# Altium PCB VIGIA_2_2.PcbDoc
Units mm, origin at the board's own origin, x right, y up, seen from the top; angles counter-clockwise.
Board outline 27 x 37 mm, 2 copper layers (Top Layer, Bottom Layer); 22 components, 24 nets, 76 pads, 6 vias.
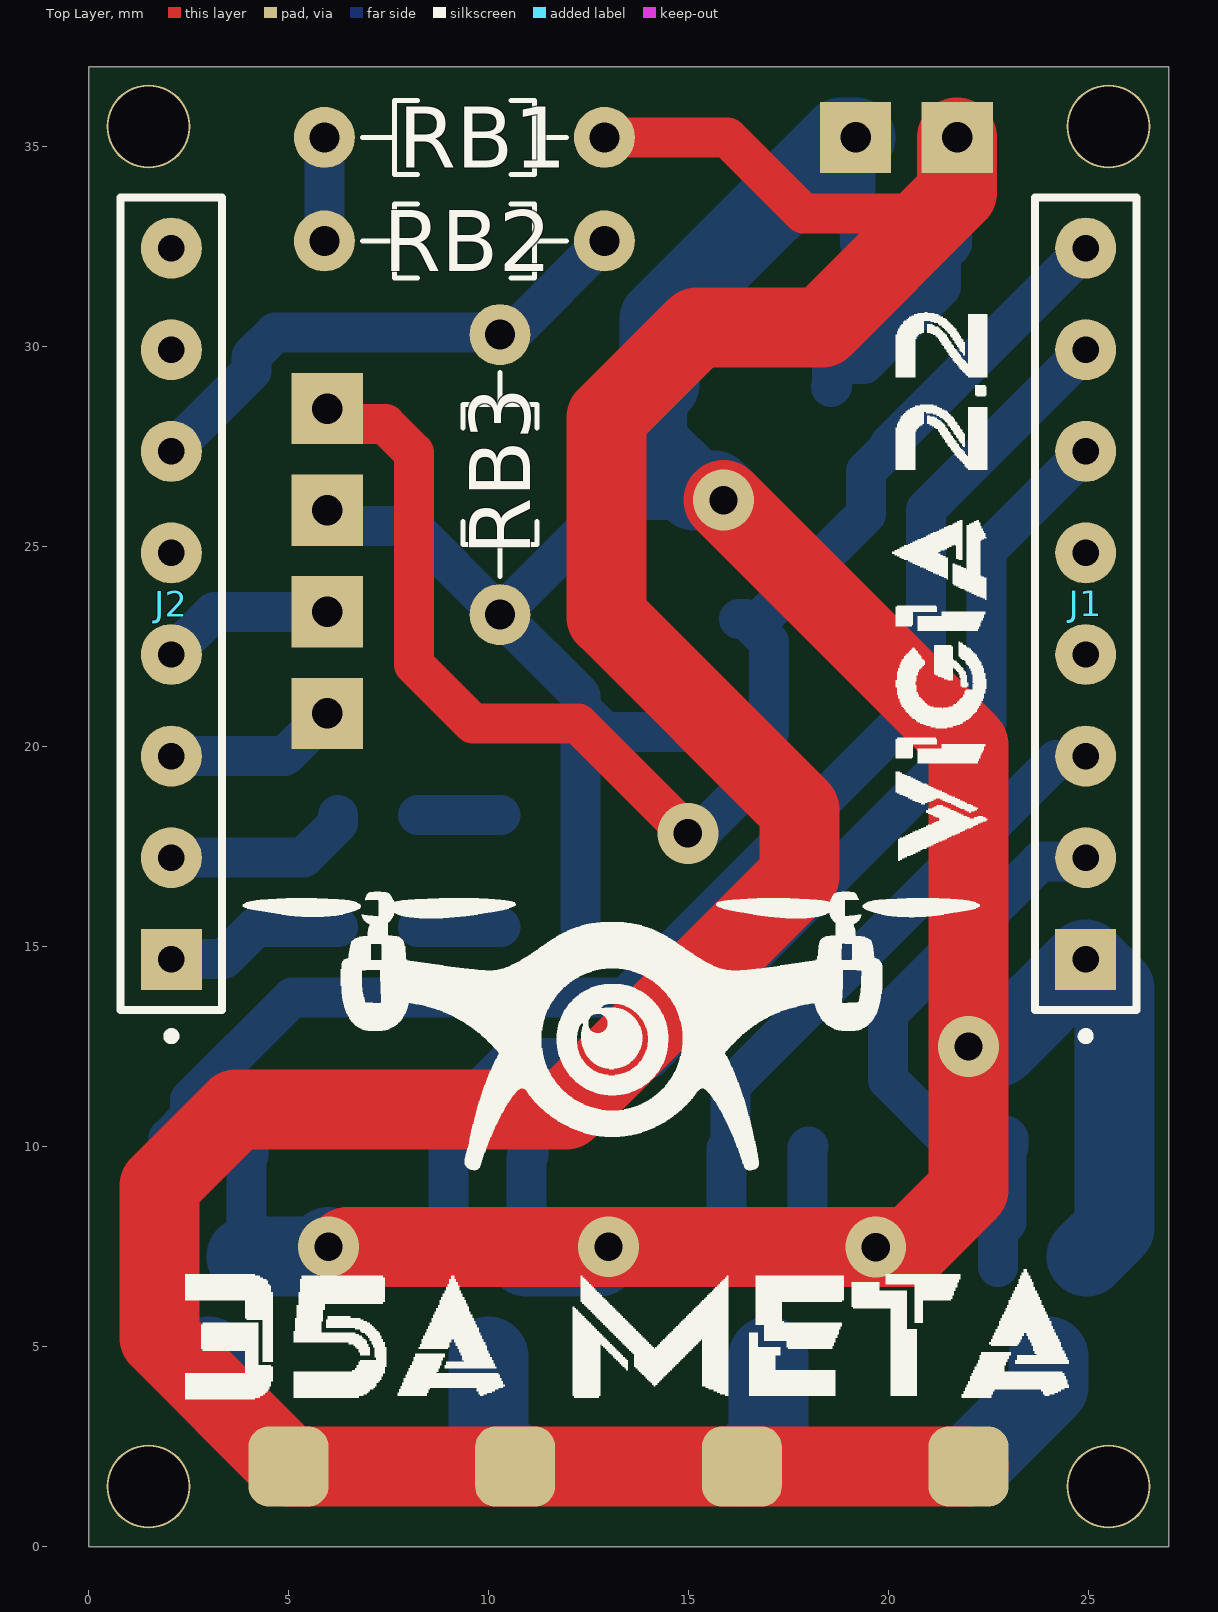
[diagram p0: Top Layer view]
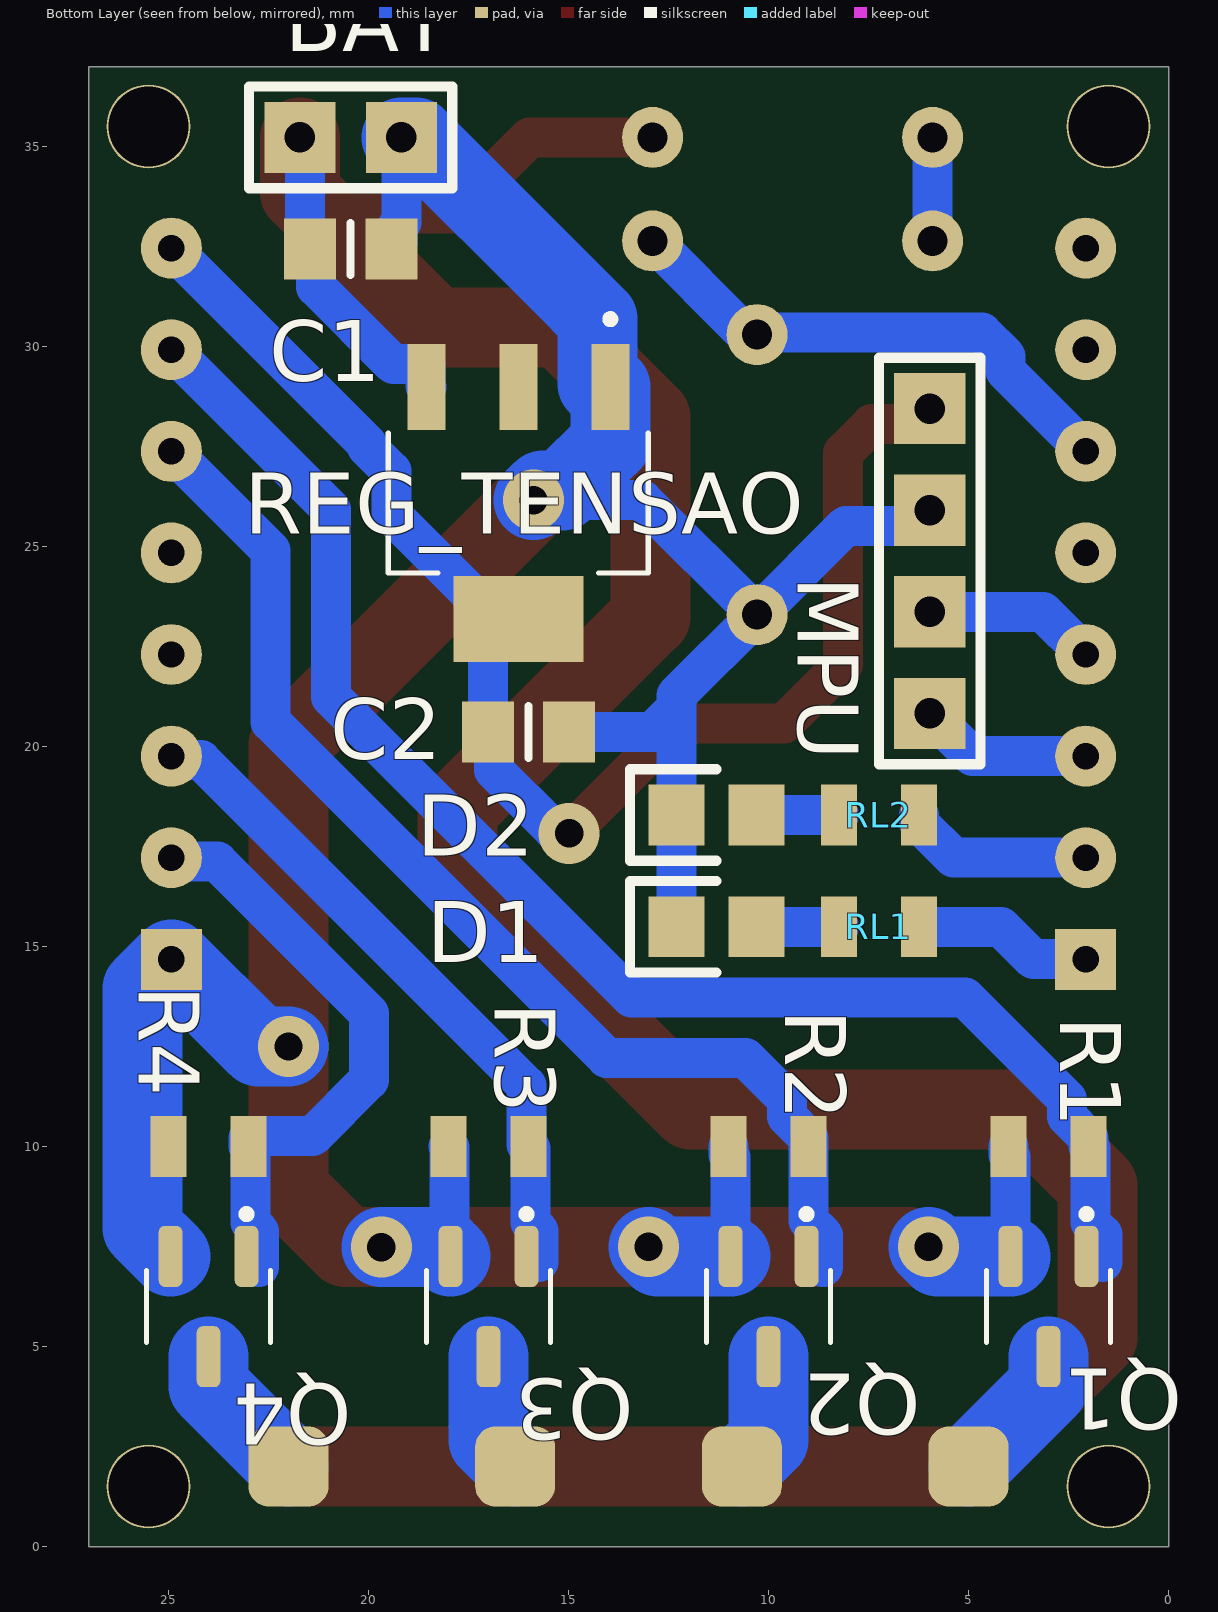
[diagram p1: Bottom Layer view, seen from below]

## Layer stack, top to bottom
Top Solder: solder mask 0.0102, Solder Resist, Dk 3.5
Top Layer: signal copper 0.0356
Dielectric 1: dielectric 0.32, FR-4, Dk 4.8
Bottom Layer: signal copper 0.0356
Bottom Solder: solder mask 0.0102, Solder Resist, Dk 3.5

## Board outline
0,0 0,37 27,37 27,0

## Design rules (kind name [scope] priority, off if disabled: settings)
Clearance [All] p1: gap=0.508 ignorepadtopadclearanceinfootprint=FALSE
PolygonConnect [All] p1: connectstyle=Relief reliefconductorwidth=0.254 reliefentries=4 polygonreliefangle="90 Angle" airgapwidth=0.254
RoutingVias [All] p1: holewidth=0.711 width=1.27 viastyle="Through Hole" minholewidth=0.711 minwidth=1.27 maxholewidth=0.711 maxwidth=1.27
SolderMaskExpansion [All] p1: expansion=0.102 istentingtop=FALSE
SupplyNets "Schematic Supply Nets" [InNet('GND')] p1: voltage=0.000
Width [All] p1: maxlimit=3 minlimit=1 preferedwidth=2 minimp=50.000000 maximp=50.000000 favimp=50.000000
30 further rules are at their usual default settings.

## Components (designator, comment, footprint, x,y, rotation, side; value= is the part's Value field where it differs from the comment)
BAT "CONECTOR_2PIN" CON2 21.717,35.227 r180 bottom
C1 "CAP" "CAP 0805" 20.447,32.433 r0 bottom
C2 "CAP" "CAP 0805" 16.002,20.368 r0 bottom
D1 "DBGLED1" "LED 0805" 11.303,15.494 r0 bottom
D2 "DBGLED2" "LED 0805" 11.303,18.288 r0 bottom
J1 "GESP1" SAMTEC_SS-108-T-2 24.93,14.68 r270 top
J2 "GESP2" SAMTEC_SS-108-T-2 2.07,14.68 r270 top
MPU "CONECTOR_4PIN" CON4 5.969,28.448 r270 bottom (schematic designator MPU_6050)
Q1 "AO3400A" SOT95P280X125-3N 3,6 r270 bottom
Q2 "AO3400A" SOT95P280X125-3N 10,6 r270 bottom
Q3 "AO3400A" SOT95P280X125-3N 17,6 r270 bottom
Q4 "AO3400A" SOT95P280X125-3N 24,6 r270 bottom
R1 "RESISTOR" "RES 0805" 3,10 r180 bottom value=10k
R2 "RESISTOR" "RES 0805" 10,10 r180 bottom value=10k
R3 "RESISTOR" "RES 0805" 17,10 r180 bottom value=10k
R4 "RESISTOR" "RES 0805" 24,10 r180 bottom value=10k
RB1 "820K" RESAD700W45L350D185 9.398,35.227 r0 top
RB2 "82 Ohms" RESAD700W45L350D185 9.398,32.639 r0 top
RB3 "3M3" RESAD700W45L350D185 10.287,26.797 r90 top
REG_TENSAO "TLV1117LV33" VREG_TLV1117LV33DCYR 16.256,26.083 r270 bottom
RL1 "RESISTOR" "RES 0805" 7.239,15.494 r0 bottom value=100
RL2 "RESISTOR" "RES 0805" 7.239,18.288 r0 bottom value=100

## Footprints (in the part's own frame and the unit in brackets; to place one, negate y for a bottom-side part, rotate by r counter-clockwise, add the part's x,y. Pads: shape width x height; smd on the part's side, far side on the other; paste and mask are expansions set on the pad)
"CAP 0805" [mil] "0805"
  rect 51.18x60 smd: 1(-40,0) 2(40,0)
  silkscreen extent 0,-26 0,26, body extent -41,-24 38,23, height 35
CON2 [mil]
  rect 70x70 hole 30: 1(0,0) 2(100,0)
  silkscreen extent -50,-50 150,50, body extent -42,-47 143,45, height 519
CON4 [mil]
  rect 70x70 hole 30: 1(0,0) 2(100,0) 3(200,0) 4(300,0)
  silkscreen extent -50,-50 350,50, body extent -50,-47 343,45, height 519
"LED 0805" [mm] "0805"
  rect 1.4x1.524 smd: 1(-1,0) 2(1,0)
  silkscreen extent 0,-1.14 2.16,1.14, body extent -1.03,-0.4 1.03,0.51, height 0.85
"RES 0805" [mm] "0805 (1/8W)"
  rect 0.9x1.524 smd: 1(-1,0) 2(1,0)
  body extent -1.02,-0.63 0.95,0.6, height 0.48
RESAD700W45L350D185 [mm]
  round 1.524 hole 0.75: 1(-3.5,0) 2(3.5,0)
  silkscreen extent -2.55,-0.92 2.55,0.92, body extent -3.72,-0.92 3.72,0.92, height 1.84
SAMTEC_SS-108-T-2 [mil]
  rect 60x60 hole 25.98: 01(0,0)
  round 60 hole 25.98: 02(-100,0) 03(-200,0) 04(-300,0) 05(-400,0) 06(-500,0) 07(-600,0) 08(-700,0)
  silkscreen extent -750,-50 80,50
SOT95P280X125-3N [mm]
  rrect50% 1.524x0.59 smd: 1(-1.255,0.95) 2(-1.255,-0.95) 3(1.255,0)
  silkscreen extent -2.41,-1.55 0.9,1.55, body extent -1.4,-1.45 1.4,1.45, height 1.25
VREG_TLV1117LV33DCYR [mm]
  rect 2.15x0.95 smd: 1(-2.9,2.3) 2(-2.9,0) 3(-2.9,-2.3)
  rect 2.15x3.25 smd: 4(2.9,0)
  silkscreen extent -4.7,-3.25 1.75,3.25, body extent -3.5,-3.25 3.5,3.25, height 1.8

## Part data
C1 C2: library part "CAP. CERÂMICO", "Capacitor", Criado em=26/06/2012, Criador por="Luigi Eduardo", Pertence a=Trincabotz, Valor=10nF
D1 D2: library part LED
J1 J2: library part SS-108-T-2, "SS Series .100 Single Row Screw Machine Socket Strip", Package=None, Availability=Bad, MF=Samtec, MP=SS-108-T-2, Price=None, SnapEDA_Link=https://www.snapeda.com/parts/SS-108-T-2/Samtec/view-part/3323909/?ref=snap
  J2: Check_prices=SLA
Q1 Q2 Q3 Q4: "N-Channel 30 V 5.7A (Ta) 1.4W (Ta) Surface Mount SOT-23-3", Package="SOT-23 Alpha &amp; Omega Semiconductor Inc.", Check_prices=https://www.snapeda.com/parts/AO3400A/Alpha/view-part/?ref=eda, MF="Alpha & Omega Semiconductor", MP=AO3400A, SnapEDA_Link=https://www.snapeda.com/parts/AO3400A/Alpha/view-part/?ref=snap
R1 R2 R3 R4 RL1 RL2: "Resistor"
RB1 RB2 RB3: library part 3-1623927-1, "1 MOhms Â±5% 0.25W, 1/4W Through Hole Resistor Axial - Carbon Film", Package=None, Check_prices=https://www.snapeda.com/parts/3-1623927-1/TE+Connectivity/view-part/?ref=eda, MF="TE Connectivity", MP=3-1623927-1, SnapEDA_Link=https://www.snapeda.com/parts/3-1623927-1/TE+Connectivity/view-part/?ref=snap
REG_TENSAO: library part TLV1117LV33DCYR, "1-A, low-dropout voltage regulator", Package="SOT-223-4 Texas Instruments", Check_prices=https://www.snapeda.com/parts/TLV1117LV33DCYR/Texas+Instruments/view-part/?ref=eda, MF="Texas Instruments", MP=TLV1117LV33DCYR, SnapEDA_Link=https://www.snapeda.com/parts/TLV1117LV33DCYR/Texas+Instruments/view-part/?ref=snap

## Free pads (board coordinates)
  round 2.1 hole 2: 7(25.5,1.5) 8(1.5,1.5) 9(25.5,35.5) 10(1.5,35.5)
  rrect50% 2x2 smd far side: 11(5,2) 11(10.667,2) 11(16.333,2) 11(22,2)
  rrect50% 2x2 smd: 11(5,2) 11(10.667,2) 11(16.333,2) 11(22,2)

## Via types
v1: diameter 1.524, hole 0.711, Top Layer to Bottom Layer, 6 vias

## Nets (pads, with @x,y where several pads share a name; then routed paths per layer and width w, separated by ;. In a path a pad name is that pad's centre, name@x,y a point inside that pad or via, vN(x,y) a via of type N, cw(c..) or ccw(c..) an arc to the next point about the centre after c; other vN are vias at no path point)
3.3V: C2.2 J1.08 MPU.1 REG_TENSAO.4 | length 35.7
  Top Layer w1: MPU.1 6.358,28.059 7.423,28.059 8.136,27.346 8.136,22.056 9.618,20.574 12.24,20.574 v1@14.934,17.88
  Bottom Layer w1: v1(14.986,17.828) 15.086,17.928 15.384,17.928 16.868,19.412 C2.2@16.868,20.218 ; REG_TENSAO.4 16.443,23.183 17.018,22.608 C2.2 ; REG_TENSAO.4@16.806,23.183 19.431,25.808 19.431,26.882 20.039,27.49 20.039,27.569 J1.08
CTRLM1: J1.07 Q1.1 R1.2 | length 37.3
  Bottom Layer w1: 1.651,7.112 1.651,7.796 1.95,8.095 1.95,9.95 R1.2 2,10.212 2.542,10.754 2.542,11.18 5.086,13.724 13.421,13.724 20.939,21.242 20.939,25.929 J1.07
CTRLM2: J1.06 Q2.1 R2.2 | length 29.2
  Bottom Layer w1: 8.636,6.985 8.636,7.781 9,8.145 R2.2 9,10.212 9.542,10.754 9.542,11.18 10.578,12.216 14.045,12.216 22.447,20.618 22.447,24.897 J1.06
CTRLM3: J1.03 Q3.1 R3.2 | length 16.8
  Bottom Layer w1: 15.748,7.112 15.748,7.893 15.95,8.095 15.95,9.95 R3.2 16.05,10.05 16.05,11.522 24.187,19.66 24.83,19.66 J1.03
CTRLM4: J1.02 Q4.1 R4.2 | length 15.2
  Bottom Layer w1: 22.733,6.985 22.733,7.878 22.95,8.095 22.95,9.95 R4.2 23,10.212 22.95,10.262 21.398,10.262 19.992,11.668 19.992,13.332 23.78,17.12 24.83,17.12 J1.02
GND: BAT.2 C1.1 C2.1 D1.2 D2.2 J1.01 MPU.2 Q1.2 Q2.2 Q3.2 Q4.2 R1.1 R2.1 R3.1 R4.1 RB3.1 REG_TENSAO.1 | length 100.1
  Top Layer w2: v1@6.477,7.494 v1(13,7.494) v1@19.681,7.494 ; v1(15.875,26.162) 22,20.037 v1(22,12.5) 22,8.92 20.574,7.494 v1@19.681,7.494 ; v1(19.681,7.484) v1@19.681,7.494
  Bottom Layer w1: Q1.2 3.95,9.738 4,9.788 R1.1 ; MPU.2 6.358,25.519 8.065,25.519 RB3.1 ; Q2.2 10.95,9.738 11,9.788 R2.1 ; D1.2 D2.2 12.303,20.956 ; 14.472,26.162 13.152,26.162 RB3.1 ; C2.1 12.891,20.368 12.303,20.956 ; Q3.2 17.975,7.28 17.975,9.975 R3.1 ; BAT.2 19.177,33.099 19.281,32.995 19.281,32.583 C1.1 ; RB3.1 12.303,21.281 12.303,20.956
  Bottom Layer w2: Q1.2 5.761,7.255 v1(6,7.494) ; Q2.2 12.761,7.255 v1(13,7.494) ; v1(15.875,26.162) 15.637,26.4 15.149,26.4 13.956,27.593 REG_TENSAO.1 14.198,28.983 14.273,29.058 14.273,30.683 15.156,31.566 18.817,35.227 BAT.2 ; Q3.2 18.179,7.484 v1(19.681,7.484) ; v1(22,12.5) 22.75,12.5 J1.01 25.654,13.956 25.654,7.959 Q4.2
LEDDBG1: J2.01 RL1.1 | length 4.5
  Bottom Layer w1: J2.01 2.075,14.685 3.38,14.685 4.189,15.494 RL1.1
LEDDBG2: J2.02 RL2.1 | length 4.7
  Bottom Layer w1: J2.02 5.371,17.22 6.239,18.088 RL2.1
MBAT: J2.06 RB2.2 RB3.2 | length 13.3
  Bottom Layer w1: J2.06 4.072,29.382 4.072,29.755 4.662,30.345 10.239,30.345 RB3.2 10.387,30.397 10.656,30.397 RB2.2
NetD1_1: D1.1 RL1.2 | length 2.1
  Bottom Layer w1: RL1.2 D1.1
NetD2_1: D2.1 RL2.2 | length 2.1
  Bottom Layer w1: RL2.2 D2.1
NetJ1_04: J1.04
NetJ1_05: J1.05
NetJ2_05: J2.05
NetJ2_07: J2.07
NetJ2_08: J2.08
NetM1_1: pad.11@5,2 Q1.3 | length 3.6
  Bottom Layer w2: Q1.3 3,4 pad.11@5,2
NetM2_1: pad.11@10.667,2 Q2.3 | length 3
  Bottom Layer w2: Q2.3 10,2.667 pad.11@10.667,2
NetM3_1: pad.11@16.333,2 Q3.3 | length 3
  Bottom Layer w2: pad.11@16.333,2 17,2.667 Q3.3
NetM4_1: pad.11@22,2 Q4.3 | length 3.6
  Bottom Layer w2: pad.11@22,2 24,4 Q4.3
NetRB1_1: RB1.1 RB2.1 | length 2.6
  Bottom Layer w1: RB2.1 RB1.1
SCL: J2.04 MPU.3 | length 4.3
  Bottom Layer w1: J2.04 2.073,22.3 3.141,23.368 MPU.3
SDA: J2.03 MPU.4 | length 4.3
  Bottom Layer w1: J2.03 4.901,19.76 MPU.4
VBAT: BAT.1 C1.2 pad.11@5,2 pad.11@10.667,2 pad.11@16.333,2 pad.11@22,2 RB1.2 REG_TENSAO.3 | length 86.9
  Top Layer w1: RB1.2 15.973,35.227 17.87,33.33 20.484,33.33
  Top Layer w2: BAT.1 21.717,33.856 18.338,30.477 15.206,30.477 12.954,28.225 12.954,23.241 17.777,18.418 17.777,16.761 11.938,10.922 3.683,10.922 1.778,9.017 1.778,5.222 5,2 10.667,2 16.333,2 pad.11@22,2
  Bottom Layer w1: REG_TENSAO.3 18.581,29.008 18.581,29.558 19.382,29.558 21.313,31.489 21.313,32.283 21.59,32.56 21.59,35.1 BAT.1
pads on no net: REG_TENSAO.2

## Silkscreen, mask and mechanical layers (free items; w line width, h text height)
Top Overlay:
  drawing of 33 lines, arcs and shapes, not listed